# Altium PCB PCB2.PcbDoc (part 4 of 7)
Units mm, origin at the board's own origin, x right, y up, seen from the top; angles counter-clockwise.
Board outline 49 x 45 mm, 6 copper layers (Component Side, GND1, 3.3V, 1.2V, GND2, Solder Side), stack 1.629 mm thick; 56 components, 116 nets, 925 pads, 478 vias.
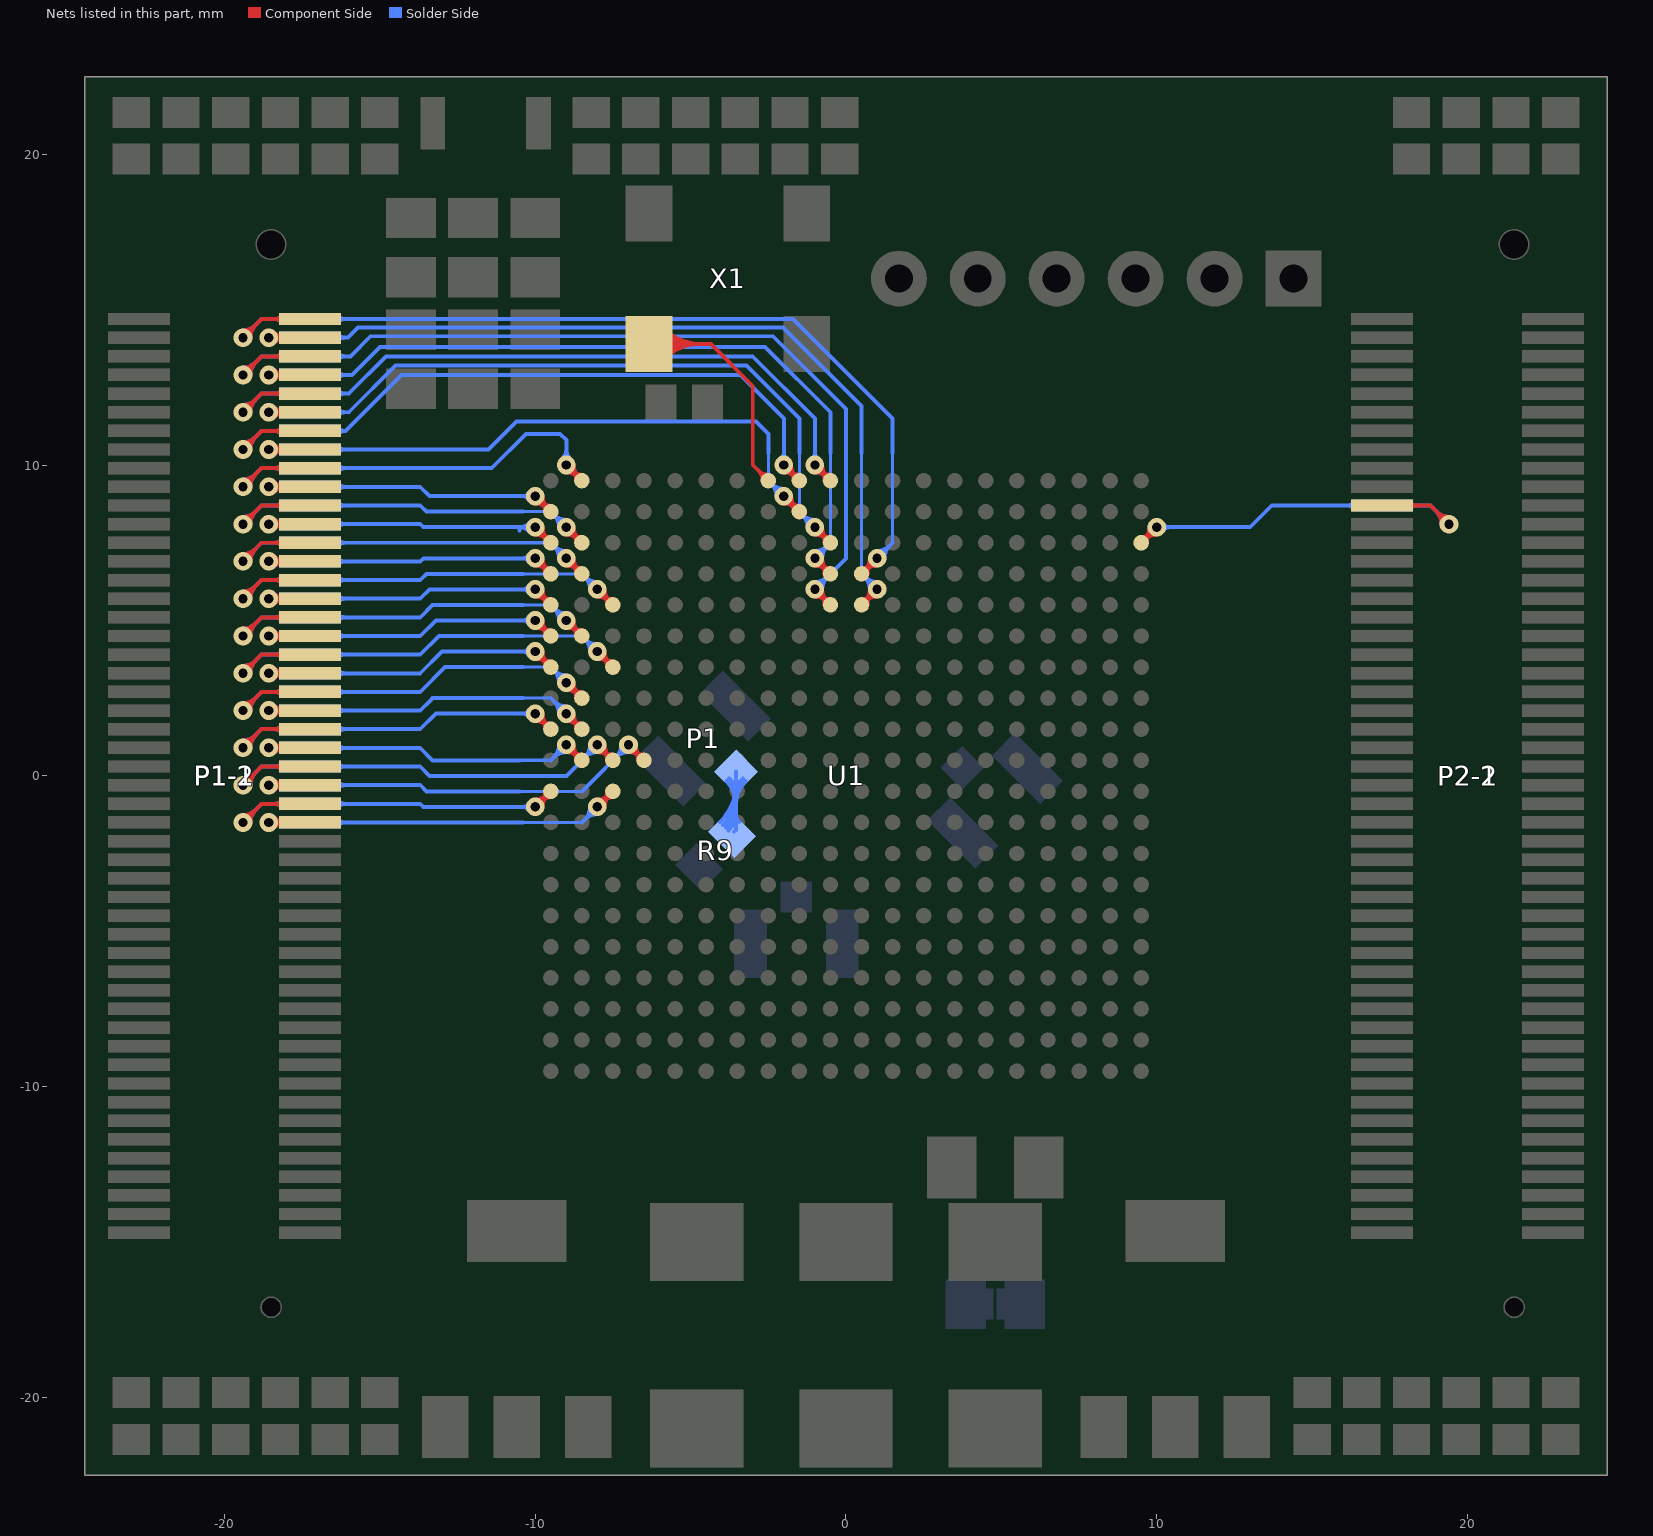
[diagram p8: the nets of this part, all layers, seen from the top]

## Via types
v1: diameter 0.6, hole 0.3, Component Side to Solder Side, tented both sides, 462 vias
v2: diameter 1.5, hole 0.8, Component Side to Solder Side, 10 vias
v3: diameter 1.2, hole 0.6, Component Side to Solder Side, 6 vias

## Nets (pads, with @x,y where several pads share a name; then routed paths per layer and width w, separated by ;. In a path a pad name is that pad's centre, name@x,y a point inside that pad or via, vN(x,y) a via of type N, cw(c..) or ccw(c..) an arc to the next point about the centre after c; other vN are vias at no path point) (continued)
NetP1_1: P1.1 R9.2 | length 16.2
  Solder Side w0.127: R9.2@-3.6,-1.8 -3.539,-1.739 P1.1@-3.539,0.139 ; -3.539,-0.914 ccw(c-4.593,-0.914) -3.848,-0.169 cw(c-4.593,-0.914) -3.539,-0.914 ; -3.539,-0.914 cw(c-2.486,-0.914) -3.231,-0.169 ccw(c-2.486,-0.914) -3.539,-0.914 ; -3.539,-0.608 ccw(c-4.287,-0.608) -3.758,-0.08 cw(c-4.287,-0.608) -3.539,-0.608 ; -3.539,-0.608 cw(c-2.792,-0.608) -3.32,-0.08 ccw(c-2.792,-0.608) -3.539,-0.608 ; R9.2@-4.049,-1.49 ccw(c-5.28,-0.26) -3.539,-0.26 cw(c-5.28,-0.26) R9.2@-4.049,-1.49 ; R9.2@-3.959,-1.58 ccw(c-4.973,-0.566) -3.539,-0.566 cw(c-4.973,-0.566) R9.2@-3.959,-1.58 ; R9.2@-3.869,-1.67 ccw(c-4.666,-0.873) -3.539,-0.873 cw(c-4.666,-0.873) R9.2@-3.869,-1.67 ; R9.2@-3.78,-1.76 ccw(c-4.36,-1.18) -3.539,-1.18 cw(c-4.36,-1.18) R9.2@-3.78,-1.76 ; -3.539,-1.231 ccw(c-3.172,-1.231) -3.432,-1.49 cw(c-3.172,-1.231) -3.539,-1.231
OSC: U1.A8 X1.3 | length 21.3
  Component Side w0.127: X1.3@-6.34,13.9 -4.35,13.9 -3,12.55 -3,11.2 -3,10.385 -3,10 U1.A8@-2.5,9.5 ; -5.296,13.9 ccw(c-5.296,12.856) -6.034,13.594 cw(c-5.296,12.856) -5.296,13.9 ; -5.296,13.9 cw(c-5.296,14.944) -6.034,14.206 ccw(c-5.296,14.944) -5.296,13.9 ; -4.989,13.9 ccw(c-4.989,12.549) -5.944,13.504 cw(c-4.989,12.549) -4.989,13.9 ; -4.989,13.9 cw(c-4.989,15.251) -5.944,14.296 ccw(c-4.989,15.251) -4.989,13.9 ; -4.683,13.9 ccw(c-4.683,12.243) -5.855,13.415 cw(c-4.683,12.243) -4.683,13.9 ; -4.683,13.9 cw(c-4.683,15.557) -5.855,14.385 ccw(c-4.683,15.557) -4.683,13.9 ; -2.818,9.818 ccw(c-2.5,10.137) -2.5,9.686 cw(c-2.5,10.137) -2.818,9.818 ; -2.818,9.818 cw(c-3.137,9.5) -2.687,9.5 ccw(c-3.137,9.5) -2.818,9.818
P1-02: P1-1.2 P1-2.2 U1.D11 | length 42
  Component Side w0.127: v1(-19.404,14.1) -18.804,14.7 P1-1.2@-17.25,14.7 ; U1.D11@0.5,6.5 v1(1,7) ; -19,14.504 ccw(c-18.597,14.1) -19.168,14.1 cw(c-18.597,14.1) -19,14.504 ; -19,14.504 cw(c-19.404,14.907) -19.404,14.336 ccw(c-19.404,14.907) -19,14.504 ; -18.38,14.7 ccw(c-18.38,15.03) -18.147,14.797 cw(c-18.38,15.03) -18.38,14.7 ; -18.38,14.7 cw(c-18.38,14.37) -18.147,14.603 ccw(c-18.38,14.37) -18.38,14.7 ; U1.D11@0.596,6.596 ccw(c0.193,7) 0.764,7 cw(c0.193,7) U1.D11@0.596,6.596 ; U1.D11@0.596,6.596 cw(c1,6.193) 1,6.764 ccw(c1,6.193) U1.D11@0.596,6.596 ; v1@0.818,6.818 ccw(c1.137,6.5) 0.686,6.5 cw(c1.137,6.5) v1@0.818,6.818 ; v1@0.818,6.818 cw(c0.5,7.137) 0.5,6.686 ccw(c0.5,7.137) v1@0.818,6.818
  Solder Side w0.1: 1.5,7.5 1.5,10.385
  Solder Side w0.127: v1(-19.404,14.1) -18.804,14.7 P1-2.2@-17.25,14.7 ; P1-2.2@-17.2,14.7 P1-2.2@-17.25,14.7 ; v1(1,7) 1.5,7.5 ; 1.5,10.385 1.5,11.1 1.5,11.5 -1.7,14.7 P1-2.2@-17.25,14.7 ; -19,14.504 ccw(c-18.597,14.1) -19.168,14.1 cw(c-18.597,14.1) -19,14.504 ; -19,14.504 cw(c-19.404,14.907) -19.404,14.336 ccw(c-19.404,14.907) -19,14.504 ; -18.38,14.7 ccw(c-18.38,15.03) -18.147,14.797 cw(c-18.38,15.03) -18.38,14.7 ; -18.38,14.7 cw(c-18.38,14.37) -18.147,14.603 ccw(c-18.38,14.37) -18.38,14.7 ; -16.12,14.7 ccw(c-16.12,14.37) -16.353,14.603 cw(c-16.12,14.37) -16.12,14.7 ; -16.12,14.7 cw(c-16.12,15.03) -16.353,14.797 ccw(c-16.12,15.03) -16.12,14.7 ; 1.404,7.404 ccw(c1.807,7) 1.237,7 cw(c1.807,7) 1.404,7.404 ; 1.404,7.404 cw(c1,7.807) 1,7.237 ccw(c1,7.807) 1.404,7.404
P1-04: P1-1.4 P1-2.4 U1.E11 | length 40.1
  Component Side w0.127: v1@-18.677,14.1 v1(-18.577,14.1) P1-1.4@-17.25,14.1 ; U1.E11@0.5,5.5 v1(1,6) ; v1@-18.38,14.1 ccw(c-18.38,14.43) -18.147,14.197 cw(c-18.38,14.43) v1@-18.38,14.1 ; v1@-18.38,14.1 cw(c-18.38,13.77) -18.147,14.003 ccw(c-18.38,13.77) v1@-18.38,14.1 ; P1-1.4@-18.006,14.1 ccw(c-18.006,13.529) -18.41,13.933 cw(c-18.006,13.529) P1-1.4@-18.006,14.1 ; P1-1.4@-18.006,14.1 cw(c-18.006,14.671) -18.41,14.267 ccw(c-18.006,14.671) P1-1.4@-18.006,14.1 ; U1.E11@0.596,5.596 ccw(c0.193,6) 0.764,6 cw(c0.193,6) U1.E11@0.596,5.596 ; U1.E11@0.596,5.596 cw(c1,5.193) 1,5.764 ccw(c1,5.193) U1.E11@0.596,5.596 ; v1@0.818,5.818 ccw(c1.137,5.5) 0.686,5.5 cw(c1.137,5.5) v1@0.818,5.818 ; v1@0.818,5.818 cw(c0.5,6.137) 0.5,5.686 ccw(c0.5,6.137) v1@0.818,5.818
  Solder Side w0.1: 0.5,6.5 0.5,10.385
  Solder Side w0.127: v1@-18.677,14.1 v1(-18.577,14.1) P1-2.4@-17.45,14.1 ; P1-2.4@-17.25,14.1 -16.023,14.1 -15.7,14.423 -2.023,14.423 0.5,11.9 0.5,10.385 ; 0.5,6.5 v1(1,6) ; v1@-18.38,14.1 ccw(c-18.38,14.43) -18.147,14.197 cw(c-18.38,14.43) v1@-18.38,14.1 ; v1@-18.38,14.1 cw(c-18.38,13.77) -18.147,14.003 ccw(c-18.38,13.77) v1@-18.38,14.1 ; P1-2.4@-18.006,14.1 ccw(c-18.006,13.529) -18.41,13.933 cw(c-18.006,13.529) P1-2.4@-18.006,14.1 ; P1-2.4@-18.006,14.1 cw(c-18.006,14.671) -18.41,14.267 ccw(c-18.006,14.671) P1-2.4@-18.006,14.1 ; -16.12,14.1 ccw(c-16.12,13.77) -16.353,14.003 cw(c-16.12,13.77) -16.12,14.1 ; -16.12,14.1 cw(c-16.12,14.43) -16.353,14.197 ccw(c-16.12,14.43) -16.12,14.1 ; 0.596,6.404 ccw(c1,6.807) 1,6.237 cw(c1,6.807) 0.596,6.404 ; 0.596,6.404 cw(c0.193,6) 0.764,6 ccw(c0.193,6) 0.596,6.404
P1-06: P1-1.6 P1-2.6 U1.E10 | length 41.9
  Component Side w0.127: v1(-19.404,12.9) -18.804,13.5 P1-1.6@-17.25,13.5 ; v1(-1,6) U1.E10@-0.5,5.5 ; -19,13.304 ccw(c-18.597,12.9) -19.168,12.9 cw(c-18.597,12.9) -19,13.304 ; -19,13.304 cw(c-19.404,13.707) -19.404,13.136 ccw(c-19.404,13.707) -19,13.304 ; -18.38,13.5 ccw(c-18.38,13.83) -18.147,13.597 cw(c-18.38,13.83) -18.38,13.5 ; -18.38,13.5 cw(c-18.38,13.17) -18.147,13.403 ccw(c-18.38,13.17) -18.38,13.5 ; v1@-0.818,5.818 ccw(c-0.5,6.137) -0.5,5.686 cw(c-0.5,6.137) v1@-0.818,5.818 ; v1@-0.818,5.818 cw(c-1.137,5.5) -0.687,5.5 ccw(c-1.137,5.5) v1@-0.818,5.818 ; U1.E10@-0.596,5.596 ccw(c-1,5.193) -1,5.764 cw(c-1,5.193) U1.E10@-0.596,5.596 ; U1.E10@-0.596,5.596 cw(c-0.193,6) -0.764,6 ccw(c-0.193,6) U1.E10@-0.596,5.596
  Solder Side w0.127: v1(-19.404,12.9) -18.804,13.5 P1-2.6@-17.25,13.5 -15.946,13.5 -15.3,14.146 -2.346,14.146 0,11.8 0,10.5 0,7 v1(-1,6) ; -19,13.304 ccw(c-18.597,12.9) -19.168,12.9 cw(c-18.597,12.9) -19,13.304 ; -19,13.304 cw(c-19.404,13.707) -19.404,13.136 ccw(c-19.404,13.707) -19,13.304 ; -18.38,13.5 ccw(c-18.38,13.83) -18.147,13.597 cw(c-18.38,13.83) -18.38,13.5 ; -18.38,13.5 cw(c-18.38,13.17) -18.147,13.403 ccw(c-18.38,13.17) -18.38,13.5 ; -16.12,13.5 ccw(c-16.12,13.17) -16.353,13.403 cw(c-16.12,13.17) -16.12,13.5 ; -16.12,13.5 cw(c-16.12,13.83) -16.353,13.597 ccw(c-16.12,13.83) -16.12,13.5 ; -0.596,6.404 ccw(c-0.193,6) -0.764,6 cw(c-0.193,6) -0.596,6.404 ; -0.596,6.404 cw(c-1,6.807) -1,6.237 ccw(c-1,6.807) -0.596,6.404
P1-08: P1-1.8 P1-2.8 U1.D10 | length 38.2
  Component Side w0.127: v1@-18.677,12.9 v1(-18.577,12.9) P1-1.8@-17.25,12.9 ; v1(-1,7) U1.D10@-0.5,6.5 ; v1@-18.38,12.9 ccw(c-18.38,13.23) -18.147,12.997 cw(c-18.38,13.23) v1@-18.38,12.9 ; v1@-18.38,12.9 cw(c-18.38,12.57) -18.147,12.803 ccw(c-18.38,12.57) v1@-18.38,12.9 ; P1-1.8@-18.006,12.9 ccw(c-18.006,12.329) -18.41,12.733 cw(c-18.006,12.329) P1-1.8@-18.006,12.9 ; P1-1.8@-18.006,12.9 cw(c-18.006,13.471) -18.41,13.067 ccw(c-18.006,13.471) P1-1.8@-18.006,12.9 ; v1@-0.818,6.818 ccw(c-0.5,7.137) -0.5,6.686 cw(c-0.5,7.137) v1@-0.818,6.818 ; v1@-0.818,6.818 cw(c-1.137,6.5) -0.687,6.5 ccw(c-1.137,6.5) v1@-0.818,6.818 ; U1.D10@-0.596,6.596 ccw(c-1,6.193) -1,6.764 cw(c-1,6.193) U1.D10@-0.596,6.596 ; U1.D10@-0.596,6.596 cw(c-0.193,7) -0.764,7 ccw(c-0.193,7) U1.D10@-0.596,6.596
  Solder Side w0.1: -0.5,7.5 -0.5,10.385
  Solder Side w0.127: v1@-18.677,12.9 v1(-18.577,12.9) P1-2.8@-17.25,12.9 -15.9,12.9 -15,13.8 -2.6,13.8 -0.5,11.7 -0.5,10.385 ; v1(-1,7) -0.5,7.5 ; v1@-18.38,12.9 ccw(c-18.38,13.23) -18.147,12.997 cw(c-18.38,13.23) v1@-18.38,12.9 ; v1@-18.38,12.9 cw(c-18.38,12.57) -18.147,12.803 ccw(c-18.38,12.57) v1@-18.38,12.9 ; P1-2.8@-18.006,12.9 ccw(c-18.006,12.329) -18.41,12.733 cw(c-18.006,12.329) P1-2.8@-18.006,12.9 ; P1-2.8@-18.006,12.9 cw(c-18.006,13.471) -18.41,13.067 ccw(c-18.006,13.471) P1-2.8@-18.006,12.9 ; -16.12,12.9 ccw(c-16.12,12.57) -16.353,12.803 cw(c-16.12,12.57) -16.12,12.9 ; -16.12,12.9 cw(c-16.12,13.23) -16.353,12.997 ccw(c-16.12,13.23) -16.12,12.9 ; -0.596,7.404 ccw(c-0.193,7) -0.764,7 cw(c-0.193,7) -0.596,7.404 ; -0.596,7.404 cw(c-1,7.807) -1,7.237 ccw(c-1,7.807) -0.596,7.404
P1-10: P1-1.10 P1-2.10 U1.A10 | length 35.3
  Component Side w0.127: v1(-19.404,11.7) -18.804,12.3 P1-1.10@-17.25,12.3 ; v1(-1,10) U1.A10@-0.5,9.5 ; -19,12.104 ccw(c-18.597,11.7) -19.168,11.7 cw(c-18.597,11.7) -19,12.104 ; -19,12.104 cw(c-19.404,12.507) -19.404,11.936 ccw(c-19.404,12.507) -19,12.104 ; -18.38,12.3 ccw(c-18.38,12.63) -18.147,12.397 cw(c-18.38,12.63) -18.38,12.3 ; -18.38,12.3 cw(c-18.38,11.97) -18.147,12.203 ccw(c-18.38,11.97) -18.38,12.3 ; v1@-0.818,9.818 ccw(c-0.5,10.137) -0.5,9.686 cw(c-0.5,10.137) v1@-0.818,9.818 ; v1@-0.818,9.818 cw(c-1.137,9.5) -0.687,9.5 ccw(c-1.137,9.5) v1@-0.818,9.818 ; U1.A10@-0.596,9.596 ccw(c-1,9.193) -1,9.764 cw(c-1,9.193) U1.A10@-0.596,9.596 ; U1.A10@-0.596,9.596 cw(c-0.193,10) -0.764,10 ccw(c-0.193,10) U1.A10@-0.596,9.596
  Solder Side w0.127: v1(-19.404,11.7) -18.804,12.3 P1-2.10@-17.25,12.3 -16,12.3 -14.8,13.5 -3,13.5 -1,11.5 -1,10.385 ; v1(-1,10) -1,10.385 ; -19,12.104 ccw(c-18.597,11.7) -19.168,11.7 cw(c-18.597,11.7) -19,12.104 ; -19,12.104 cw(c-19.404,12.507) -19.404,11.936 ccw(c-19.404,12.507) -19,12.104 ; -18.38,12.3 ccw(c-18.38,12.63) -18.147,12.397 cw(c-18.38,12.63) -18.38,12.3 ; -18.38,12.3 cw(c-18.38,11.97) -18.147,12.203 ccw(c-18.38,11.97) -18.38,12.3 ; -16.12,12.3 ccw(c-16.12,11.97) -16.353,12.203 cw(c-16.12,11.97) -16.12,12.3 ; -16.12,12.3 cw(c-16.12,12.63) -16.353,12.397 ccw(c-16.12,12.63) -16.12,12.3 ; -1,10.385 ccw(c-0.805,10.385) -0.893,10.211 cw(c-0.805,10.385) -1,10.385 ; -1,10.385 cw(c-1.195,10.385) -1.107,10.211 ccw(c-1.195,10.385) -1,10.385
P1-12: P1-1.12 P1-2.12 U1.C10 | length 36
  Component Side w0.127: v1@-18.677,11.7 v1(-18.577,11.7) P1-1.12@-17.25,11.7 ; v1(-1,8) U1.C10@-0.5,7.5 ; v1@-18.38,11.7 ccw(c-18.38,12.03) -18.147,11.797 cw(c-18.38,12.03) v1@-18.38,11.7 ; v1@-18.38,11.7 cw(c-18.38,11.37) -18.147,11.603 ccw(c-18.38,11.37) v1@-18.38,11.7 ; P1-1.12@-18.006,11.7 ccw(c-18.006,11.129) -18.41,11.533 cw(c-18.006,11.129) P1-1.12@-18.006,11.7 ; P1-1.12@-18.006,11.7 cw(c-18.006,12.271) -18.41,11.867 ccw(c-18.006,12.271) P1-1.12@-18.006,11.7 ; v1@-0.818,7.818 ccw(c-0.5,8.137) -0.5,7.686 cw(c-0.5,8.137) v1@-0.818,7.818 ; v1@-0.818,7.818 cw(c-1.137,7.5) -0.687,7.5 ccw(c-1.137,7.5) v1@-0.818,7.818 ; U1.C10@-0.596,7.596 ccw(c-1,7.193) -1,7.764 cw(c-1,7.193) U1.C10@-0.596,7.596 ; U1.C10@-0.596,7.596 cw(c-0.193,8) -0.764,8 ccw(c-0.193,8) U1.C10@-0.596,7.596
  Solder Side w0.1: -1.5,8.5 -1.5,10.385
  Solder Side w0.127: v1@-18.677,11.7 v1(-18.577,11.7) P1-2.12@-17.25,11.7 -16,11.7 -14.5,13.2 -3.2,13.2 -1.5,11.5 -1.5,10.385 ; -1.5,8.5 v1(-1,8) ; v1@-18.38,11.7 ccw(c-18.38,12.03) -18.147,11.797 cw(c-18.38,12.03) v1@-18.38,11.7 ; v1@-18.38,11.7 cw(c-18.38,11.37) -18.147,11.603 ccw(c-18.38,11.37) v1@-18.38,11.7 ; P1-2.12@-18.006,11.7 ccw(c-18.006,11.129) -18.41,11.533 cw(c-18.006,11.129) P1-2.12@-18.006,11.7 ; P1-2.12@-18.006,11.7 cw(c-18.006,12.271) -18.41,11.867 ccw(c-18.006,12.271) P1-2.12@-18.006,11.7 ; -16.12,11.7 ccw(c-16.12,11.37) -16.353,11.603 cw(c-16.12,11.37) -16.12,11.7 ; -16.12,11.7 cw(c-16.12,12.03) -16.353,11.797 ccw(c-16.12,12.03) -16.12,11.7 ; -1.404,8.404 ccw(c-1,8.807) -1,8.237 cw(c-1,8.807) -1.404,8.404 ; -1.404,8.404 cw(c-1.807,8) -1.237,8 ccw(c-1.807,8) -1.404,8.404
P1-14: P1-1.14 P1-2.14 U1.A9 | length 34.4
  Component Side w0.127: v1(-19.404,10.5) -18.804,11.1 P1-1.14@-17.25,11.1 ; v1(-2,10) U1.A9@-1.5,9.5 ; -19,10.904 ccw(c-18.597,10.5) -19.168,10.5 cw(c-18.597,10.5) -19,10.904 ; -19,10.904 cw(c-19.404,11.307) -19.404,10.736 ccw(c-19.404,11.307) -19,10.904 ; -18.38,11.1 ccw(c-18.38,11.43) -18.147,11.197 cw(c-18.38,11.43) -18.38,11.1 ; -18.38,11.1 cw(c-18.38,10.77) -18.147,11.003 ccw(c-18.38,10.77) -18.38,11.1 ; v1@-1.818,9.818 ccw(c-1.5,10.137) -1.5,9.686 cw(c-1.5,10.137) v1@-1.818,9.818 ; v1@-1.818,9.818 cw(c-2.137,9.5) -1.687,9.5 ccw(c-2.137,9.5) v1@-1.818,9.818 ; U1.A9@-1.596,9.596 ccw(c-2,9.193) -2,9.764 cw(c-2,9.193) U1.A9@-1.596,9.596 ; U1.A9@-1.596,9.596 cw(c-1.193,10) -1.764,10 ccw(c-1.193,10) U1.A9@-1.596,9.596
  Solder Side w0.127: v1(-19.404,10.5) -18.804,11.1 P1-2.14@-17.25,11.1 ; P1-2.14@-17.2,11.1 P1-2.14@-17.25,11.1 ; v1(-2,10) -2,10.385 ; -19,10.904 ccw(c-18.597,10.5) -19.168,10.5 cw(c-18.597,10.5) -19,10.904 ; -19,10.904 cw(c-19.404,11.307) -19.404,10.736 ccw(c-19.404,11.307) -19,10.904 ; -18.38,11.1 ccw(c-18.38,11.43) -18.147,11.197 cw(c-18.38,11.43) -18.38,11.1 ; -18.38,11.1 cw(c-18.38,10.77) -18.147,11.003 ccw(c-18.38,10.77) -18.38,11.1 ; P1-2.14@-17.25,11.1 -16.1,11.1 -14.3,12.9 -3.4,12.9 -2,11.5 -2,11 -2,10.385 ; -16.12,11.1 ccw(c-16.12,10.77) -16.353,11.003 cw(c-16.12,10.77) -16.12,11.1 ; -16.12,11.1 cw(c-16.12,11.43) -16.353,11.197 ccw(c-16.12,11.43) -16.12,11.1 ; -2,10.385 ccw(c-1.805,10.385) -1.893,10.211 cw(c-1.805,10.385) -2,10.385 ; -2,10.385 cw(c-2.195,10.385) -2.107,10.211 ccw(c-2.195,10.385) -2,10.385
P1-16: P1-1.16 P1-2.16 U1.B9 | length 32.8
  Component Side w0.127: v1@-18.677,10.5 v1(-18.577,10.5) P1-1.16@-17.25,10.5 ; v1(-2,9) U1.B9@-1.5,8.5 ; v1@-18.38,10.5 ccw(c-18.38,10.83) -18.147,10.597 cw(c-18.38,10.83) v1@-18.38,10.5 ; v1@-18.38,10.5 cw(c-18.38,10.17) -18.147,10.403 ccw(c-18.38,10.17) v1@-18.38,10.5 ; P1-1.16@-18.006,10.5 ccw(c-18.006,9.929) -18.41,10.333 cw(c-18.006,9.929) P1-1.16@-18.006,10.5 ; P1-1.16@-18.006,10.5 cw(c-18.006,11.071) -18.41,10.667 ccw(c-18.006,11.071) P1-1.16@-18.006,10.5 ; v1@-1.818,8.818 ccw(c-1.5,9.137) -1.5,8.686 cw(c-1.5,9.137) v1@-1.818,8.818 ; v1@-1.818,8.818 cw(c-2.137,8.5) -1.687,8.5 ccw(c-2.137,8.5) v1@-1.818,8.818 ; U1.B9@-1.596,8.596 ccw(c-2,8.193) -2,8.764 cw(c-2,8.193) U1.B9@-1.596,8.596 ; U1.B9@-1.596,8.596 cw(c-1.193,9) -1.764,9 ccw(c-1.193,9) U1.B9@-1.596,8.596
  Solder Side w0.1: -2.5,9.5 -2.5,10.385
  Solder Side w0.127: v1@-18.677,10.5 v1(-18.577,10.5) P1-2.16@-17.25,10.5 -11.5,10.5 -10.6,11.4 -2.9,11.4 -2.5,11 -2.5,10.385 ; -2.5,9.5 v1(-2,9) ; v1@-18.38,10.5 ccw(c-18.38,10.83) -18.147,10.597 cw(c-18.38,10.83) v1@-18.38,10.5 ; v1@-18.38,10.5 cw(c-18.38,10.17) -18.147,10.403 ccw(c-18.38,10.17) v1@-18.38,10.5 ; P1-2.16@-18.006,10.5 ccw(c-18.006,9.929) -18.41,10.333 cw(c-18.006,9.929) P1-2.16@-18.006,10.5 ; P1-2.16@-18.006,10.5 cw(c-18.006,11.071) -18.41,10.667 ccw(c-18.006,11.071) P1-2.16@-18.006,10.5 ; -16.12,10.5 ccw(c-16.12,10.17) -16.353,10.403 cw(c-16.12,10.17) -16.12,10.5 ; -16.12,10.5 cw(c-16.12,10.83) -16.353,10.597 ccw(c-16.12,10.83) -16.12,10.5 ; -2.404,9.404 ccw(c-2,9.807) -2,9.237 cw(c-2,9.807) -2.404,9.404 ; -2.404,9.404 cw(c-2.807,9) -2.237,9 ccw(c-2.807,9) -2.404,9.404
P1-18: P1-1.18 P1-2.18 U1.A2 | length 26.5
  Component Side w0.127: v1(-19.404,9.3) -18.804,9.9 P1-1.18@-17.25,9.9 ; v1(-9,10) U1.A2@-8.5,9.5 ; -19,9.704 ccw(c-18.597,9.3) -19.168,9.3 cw(c-18.597,9.3) -19,9.704 ; -19,9.704 cw(c-19.404,10.107) -19.404,9.536 ccw(c-19.404,10.107) -19,9.704 ; -18.38,9.9 ccw(c-18.38,10.23) -18.147,9.997 cw(c-18.38,10.23) -18.38,9.9 ; -18.38,9.9 cw(c-18.38,9.57) -18.147,9.803 ccw(c-18.38,9.57) -18.38,9.9 ; v1@-8.818,9.818 ccw(c-8.5,10.137) -8.5,9.686 cw(c-8.5,10.137) v1@-8.818,9.818 ; v1@-8.818,9.818 cw(c-9.137,9.5) -8.686,9.5 ccw(c-9.137,9.5) v1@-8.818,9.818 ; U1.A2@-8.596,9.596 ccw(c-9,9.193) -9,9.764 cw(c-9,9.193) U1.A2@-8.596,9.596 ; U1.A2@-8.596,9.596 cw(c-8.193,10) -8.764,10 ccw(c-8.193,10) U1.A2@-8.596,9.596
  Solder Side w0.127: v1(-19.404,9.3) -18.804,9.9 P1-2.18@-17.25,9.9 ; P1-2.18@-17.2,9.9 P1-2.18@-17.25,9.9 ; v1(-9,10) -9,10.5 ; -19,9.704 ccw(c-18.597,9.3) -19.168,9.3 cw(c-18.597,9.3) -19,9.704 ; -19,9.704 cw(c-19.404,10.107) -19.404,9.536 ccw(c-19.404,10.107) -19,9.704 ; -18.38,9.9 ccw(c-18.38,10.23) -18.147,9.997 cw(c-18.38,10.23) -18.38,9.9 ; -18.38,9.9 cw(c-18.38,9.57) -18.147,9.803 ccw(c-18.38,9.57) -18.38,9.9 ; P1-2.18@-17.25,9.9 -11.5,9.9 -11.4,9.9 -10.3,11 -9.2,11 -9,10.8 -9,10.5 ; -16.12,9.9 ccw(c-16.12,9.57) -16.353,9.803 cw(c-16.12,9.57) -16.12,9.9 ; -16.121,9.9 cw(c-16.121,10.229) -16.353,9.997 ccw(c-16.121,10.229) -16.121,9.9 ; -9,10.5 ccw(c-8.59,10.5) -8.85,10.183 cw(c-8.59,10.5) -9,10.5 ; -9,10.5 cw(c-9.41,10.5) -9.15,10.183 ccw(c-9.41,10.5) -9,10.5
P1-20: P1-1.20 P1-2.20 U1.B1 | length 21.7
  Component Side w0.127: v1@-18.677,9.3 v1(-18.577,9.3) P1-1.20@-17.25,9.3 ; v1(-10,9) U1.B1@-9.5,8.5 ; v1@-18.38,9.3 ccw(c-18.38,9.63) -18.147,9.397 cw(c-18.38,9.63) v1@-18.38,9.3 ; v1@-18.38,9.3 cw(c-18.38,8.97) -18.147,9.203 ccw(c-18.38,8.97) v1@-18.38,9.3 ; P1-1.20@-18.006,9.3 ccw(c-18.006,8.729) -18.41,9.133 cw(c-18.006,8.729) P1-1.20@-18.006,9.3 ; P1-1.20@-18.006,9.3 cw(c-18.006,9.871) -18.41,9.467 ccw(c-18.006,9.871) P1-1.20@-18.006,9.3 ; v1@-9.818,8.818 ccw(c-9.5,9.137) -9.5,8.686 cw(c-9.5,9.137) v1@-9.818,8.818 ; v1@-9.818,8.818 cw(c-10.137,8.5) -9.686,8.5 ccw(c-10.137,8.5) v1@-9.818,8.818 ; U1.B1@-9.596,8.596 ccw(c-10,8.193) -10,8.764 cw(c-10,8.193) U1.B1@-9.596,8.596 ; U1.B1@-9.596,8.596 cw(c-9.193,9) -9.764,9 ccw(c-9.193,9) U1.B1@-9.596,8.596
  Solder Side w0.127: v1@-18.677,9.3 v1(-18.577,9.3) P1-2.20@-17.25,9.3 -13.7,9.3 -13.4,9 -11.5,9 -10.385,9 ; v1(-10,9) -10.385,9 ; v1@-18.38,9.3 ccw(c-18.38,9.63) -18.147,9.397 cw(c-18.38,9.63) v1@-18.38,9.3 ; v1@-18.38,9.3 cw(c-18.38,8.97) -18.147,9.203 ccw(c-18.38,8.97) v1@-18.38,9.3 ; P1-2.20@-18.006,9.3 ccw(c-18.006,8.729) -18.41,9.133 cw(c-18.006,8.729) P1-2.20@-18.006,9.3 ; P1-2.20@-18.006,9.3 cw(c-18.006,9.871) -18.41,9.467 ccw(c-18.006,9.871) P1-2.20@-18.006,9.3 ; -16.12,9.3 ccw(c-16.12,8.97) -16.353,9.203 cw(c-16.12,8.97) -16.12,9.3 ; -16.121,9.3 cw(c-16.121,9.629) -16.353,9.397 ccw(c-16.121,9.629) -16.121,9.3 ; -10.385,9 ccw(c-10.385,9.195) -10.211,9.107 cw(c-10.385,9.195) -10.385,9 ; -10.385,9 cw(c-10.385,8.805) -10.211,8.893 ccw(c-10.385,8.805) -10.385,9
P1-21: P2-1.21 P2-2.21 U1.C20 | length 23.8
  Component Side w0.127: U1.C20@9.5,7.5 v1(10,8) ; P2-1.21@17.25,8.7 18.804,8.7 v1(19.404,8.1) ; U1.C20@9.596,7.596 ccw(c9.193,8) 9.764,8 cw(c9.193,8) U1.C20@9.596,7.596 ; U1.C20@9.596,7.596 cw(c10,7.193) 10,7.764 ccw(c10,7.193) U1.C20@9.596,7.596 ; v1@9.818,7.818 ccw(c10.137,7.5) 9.687,7.5 cw(c10.137,7.5) v1@9.818,7.818 ; v1@9.818,7.818 cw(c9.5,8.137) 9.5,7.686 ccw(c9.5,8.137) v1@9.818,7.818 ; 18.38,8.7 ccw(c18.38,8.37) 18.147,8.603 cw(c18.38,8.37) 18.38,8.7 ; 18.38,8.7 cw(c18.38,9.03) 18.147,8.797 ccw(c18.38,9.03) 18.38,8.7 ; 19,8.504 ccw(c19.404,8.907) 19.404,8.336 cw(c19.404,8.907) 19,8.504 ; 19,8.504 cw(c18.597,8.1) 19.168,8.1 ccw(c18.597,8.1) 19,8.504
  Solder Side w0.127: v1(10,8) 10.385,8 ; v1(19.404,8.1) 18.804,8.7 P2-2.21@17.25,8.7 13.7,8.7 13,8 11.5,8 10.385,8 ; 10.385,8 ccw(c10.385,7.805) 10.211,7.893 cw(c10.385,7.805) 10.385,8 ; 10.385,8 cw(c10.385,8.195) 10.211,8.107 ccw(c10.385,8.195) 10.385,8 ; 16.12,8.7 ccw(c16.12,9.03) 16.353,8.797 cw(c16.12,9.03) 16.12,8.7 ; 16.12,8.7 cw(c16.12,8.37) 16.353,8.603 ccw(c16.12,8.37) 16.12,8.7 ; 18.38,8.7 ccw(c18.38,8.37) 18.147,8.603 cw(c18.38,8.37) 18.38,8.7 ; 18.38,8.7 cw(c18.38,9.03) 18.147,8.797 ccw(c18.38,9.03) 18.38,8.7 ; 19,8.504 ccw(c19.404,8.907) 19.404,8.336 cw(c19.404,8.907) 19,8.504 ; 19,8.504 cw(c18.597,8.1) 19.168,8.1 ccw(c18.597,8.1) 19,8.504
P1-22: P1-1.22 P1-2.22 U1.C2 | length 25.7
  Component Side w0.127: v1(-19.404,8.1) -18.804,8.7 P1-1.22@-17.25,8.7 ; v1(-9,8) U1.C2@-8.5,7.5 ; -19,8.504 ccw(c-18.597,8.1) -19.168,8.1 cw(c-18.597,8.1) -19,8.504 ; -19,8.504 cw(c-19.404,8.907) -19.404,8.336 ccw(c-19.404,8.907) -19,8.504 ; -18.38,8.7 ccw(c-18.38,9.03) -18.147,8.797 cw(c-18.38,9.03) -18.38,8.7 ; -18.38,8.7 cw(c-18.38,8.37) -18.147,8.603 ccw(c-18.38,8.37) -18.38,8.7 ; v1@-8.818,7.818 ccw(c-8.5,8.137) -8.5,7.686 cw(c-8.5,8.137) v1@-8.818,7.818 ; v1@-8.818,7.818 cw(c-9.137,7.5) -8.686,7.5 ccw(c-9.137,7.5) v1@-8.818,7.818 ; U1.C2@-8.596,7.596 ccw(c-9,7.193) -9,7.764 cw(c-9,7.193) U1.C2@-8.596,7.596 ; U1.C2@-8.596,7.596 cw(c-8.193,8) -8.764,8 ccw(c-8.193,8) U1.C2@-8.596,7.596
  Solder Side w0.1: -10.385,8.5 -9.5,8.5
  Solder Side w0.127: v1(-19.404,8.1) -18.804,8.7 P1-2.22@-17.25,8.7 -13.7,8.7 -13.5,8.5 -11.5,8.5 -10.385,8.5 ; -9.5,8.5 v1(-9,8) ; -19,8.504 ccw(c-18.597,8.1) -19.168,8.1 cw(c-18.597,8.1) -19,8.504 ; -19,8.504 cw(c-19.404,8.907) -19.404,8.336 ccw(c-19.404,8.907) -19,8.504 ; -18.38,8.7 ccw(c-18.38,9.03) -18.147,8.797 cw(c-18.38,9.03) -18.38,8.7 ; -18.38,8.7 cw(c-18.38,8.37) -18.147,8.603 ccw(c-18.38,8.37) -18.38,8.7 ; -16.12,8.7 ccw(c-16.12,8.37) -16.353,8.603 cw(c-16.12,8.37) -16.12,8.7 ; -16.121,8.7 cw(c-16.121,9.029) -16.353,8.797 ccw(c-16.121,9.029) -16.121,8.7 ; -9.404,8.404 ccw(c-9,8.807) -9,8.237 cw(c-9,8.807) -9.404,8.404 ; -9.404,8.404 cw(c-9.807,8) -9.237,8 ccw(c-9.807,8) -9.404,8.404
P1-24: P1-1.24 P1-2.24 U1.C1 | length 22.3
  Component Side w0.127: v1@-18.677,8.1 v1(-18.577,8.1) P1-1.24@-17.25,8.1 ; v1(-10,8) U1.C1@-9.5,7.5 ; v1@-18.38,8.1 ccw(c-18.38,8.43) -18.147,8.197 cw(c-18.38,8.43) v1@-18.38,8.1 ; v1@-18.38,8.1 cw(c-18.38,7.77) -18.147,8.003 ccw(c-18.38,7.77) v1@-18.38,8.1 ; P1-1.24@-18.006,8.1 ccw(c-18.006,7.529) -18.41,7.933 cw(c-18.006,7.529) P1-1.24@-18.006,8.1 ; P1-1.24@-18.006,8.1 cw(c-18.006,8.671) -18.41,8.267 ccw(c-18.006,8.671) P1-1.24@-18.006,8.1 ; v1@-9.818,7.818 ccw(c-9.5,8.137) -9.5,7.686 cw(c-9.5,8.137) v1@-9.818,7.818 ; v1@-9.818,7.818 cw(c-10.137,7.5) -9.686,7.5 ccw(c-10.137,7.5) v1@-9.818,7.818 ; U1.C1@-9.596,7.596 ccw(c-10,7.193) -10,7.764 cw(c-10,7.193) U1.C1@-9.596,7.596 ; U1.C1@-9.596,7.596 cw(c-9.193,8) -9.764,8 ccw(c-9.193,8) U1.C1@-9.596,7.596
  Solder Side w0.127: v1@-18.677,8.1 v1(-18.577,8.1) P1-2.24@-17.25,8.1 ; P1-2.24@-17.25,8.1 -13.7,8.1 ; -13.7,8.1 -13.6,8 -11.5,8 -10.5,8 ; -10.5,7.9 -10.5,8 ; v1(-10,8) -10.5,8 ; v1@-18.38,8.1 ccw(c-18.38,8.43) -18.147,8.197 cw(c-18.38,8.43) v1@-18.38,8.1 ; v1@-18.38,8.1 cw(c-18.38,7.77) -18.147,8.003 ccw(c-18.38,7.77) v1@-18.38,8.1 ; P1-2.24@-18.006,8.1 ccw(c-18.006,7.529) -18.41,7.933 cw(c-18.006,7.529) P1-2.24@-18.006,8.1 ; P1-2.24@-18.006,8.1 cw(c-18.006,8.671) -18.41,8.267 ccw(c-18.006,8.671) P1-2.24@-18.006,8.1 ; -16.12,8.1 ccw(c-16.12,7.77) -16.353,8.003 cw(c-16.12,7.77) -16.12,8.1 ; -16.121,8.1 cw(c-16.121,8.429) -16.353,8.197 ccw(c-16.121,8.429) -16.121,8.1 ; -10.5,8 ccw(c-10.5,8.41) -10.183,8.15 cw(c-10.5,8.41) -10.5,8 ; -10.5,8 cw(c-10.5,7.59) -10.183,7.85 ccw(c-10.5,7.59) -10.5,8
P1-26: P1-1.26 P1-2.26 U1.D2 | length 25.7
  Component Side w0.127: v1(-19.404,6.9) -18.804,7.5 P1-1.26@-17.25,7.5 ; v1(-9,7) U1.D2@-8.5,6.5 ; -19,7.304 ccw(c-18.597,6.9) -19.168,6.9 cw(c-18.597,6.9) -19,7.304 ; -19,7.304 cw(c-19.404,7.707) -19.404,7.136 ccw(c-19.404,7.707) -19,7.304 ; -18.38,7.5 ccw(c-18.38,7.83) -18.147,7.597 cw(c-18.38,7.83) -18.38,7.5 ; -18.38,7.5 cw(c-18.38,7.17) -18.147,7.403 ccw(c-18.38,7.17) -18.38,7.5 ; v1@-8.818,6.818 ccw(c-8.5,7.137) -8.5,6.686 cw(c-8.5,7.137) v1@-8.818,6.818 ; v1@-8.818,6.818 cw(c-9.137,6.5) -8.686,6.5 ccw(c-9.137,6.5) v1@-8.818,6.818 ; U1.D2@-8.596,6.596 ccw(c-9,6.193) -9,6.764 cw(c-9,6.193) U1.D2@-8.596,6.596 ; U1.D2@-8.596,6.596 cw(c-8.193,7) -8.764,7 ccw(c-8.193,7) U1.D2@-8.596,6.596
  Solder Side w0.1: -10.385,7.5 -9.5,7.5
  Solder Side w0.127: v1(-19.404,6.9) -18.804,7.5 P1-2.26@-17.25,7.5 ; P1-2.26@-17.2,7.5 P1-2.26@-17.25,7.5 ; -10.385,7.5 -11.5,7.5 P1-2.26@-17.25,7.5 ; -9.5,7.5 v1(-9,7) ; -19,7.304 ccw(c-18.597,6.9) -19.168,6.9 cw(c-18.597,6.9) -19,7.304 ; -19,7.304 cw(c-19.404,7.707) -19.404,7.136 ccw(c-19.404,7.707) -19,7.304 ; -18.38,7.5 ccw(c-18.38,7.83) -18.147,7.597 cw(c-18.38,7.83) -18.38,7.5 ; -18.38,7.5 cw(c-18.38,7.17) -18.147,7.403 ccw(c-18.38,7.17) -18.38,7.5 ; -16.12,7.5 ccw(c-16.12,7.17) -16.353,7.403 cw(c-16.12,7.17) -16.12,7.5 ; -16.121,7.5 cw(c-16.121,7.829) -16.353,7.597 ccw(c-16.121,7.829) -16.121,7.5 ; -9.404,7.404 ccw(c-9,7.807) -9,7.237 cw(c-9,7.807) -9.404,7.404 ; -9.404,7.404 cw(c-9.807,7) -9.237,7 ccw(c-9.807,7) -9.404,7.404
P1-28: P1-1.28 P1-2.28 U1.D1 | length 21.6
  Component Side w0.127: v1@-18.677,6.9 v1(-18.577,6.9) P1-1.28@-17.25,6.9 ; v1(-10,7) U1.D1@-9.5,6.5 ; v1@-18.38,6.9 ccw(c-18.38,7.23) -18.147,6.997 cw(c-18.38,7.23) v1@-18.38,6.9 ; v1@-18.38,6.9 cw(c-18.38,6.57) -18.147,6.803 ccw(c-18.38,6.57) v1@-18.38,6.9 ; P1-1.28@-18.006,6.9 ccw(c-18.006,6.329) -18.41,6.733 cw(c-18.006,6.329) P1-1.28@-18.006,6.9 ; P1-1.28@-18.006,6.9 cw(c-18.006,7.471) -18.41,7.067 ccw(c-18.006,7.471) P1-1.28@-18.006,6.9 ; v1@-9.818,6.818 ccw(c-9.5,7.137) -9.5,6.686 cw(c-9.5,7.137) v1@-9.818,6.818 ; v1@-9.818,6.818 cw(c-10.137,6.5) -9.686,6.5 ccw(c-10.137,6.5) v1@-9.818,6.818 ; U1.D1@-9.596,6.596 ccw(c-10,6.193) -10,6.764 cw(c-10,6.193) U1.D1@-9.596,6.596 ; U1.D1@-9.596,6.596 cw(c-9.193,7) -9.764,7 ccw(c-9.193,7) U1.D1@-9.596,6.596
  Solder Side w0.127: v1@-18.677,6.9 v1(-18.577,6.9) P1-2.28@-17.25,6.9 -13.7,6.9 -13.6,7 -11.5,7 -10.385,7 ; v1(-10,7) -10.385,7 ; v1@-18.38,6.9 ccw(c-18.38,7.23) -18.147,6.997 cw(c-18.38,7.23) v1@-18.38,6.9 ; v1@-18.38,6.9 cw(c-18.38,6.57) -18.147,6.803 ccw(c-18.38,6.57) v1@-18.38,6.9 ; P1-2.28@-18.006,6.9 ccw(c-18.006,6.329) -18.41,6.733 cw(c-18.006,6.329) P1-2.28@-18.006,6.9 ; P1-2.28@-18.006,6.9 cw(c-18.006,7.471) -18.41,7.067 ccw(c-18.006,7.471) P1-2.28@-18.006,6.9 ; -16.12,6.9 ccw(c-16.12,6.57) -16.353,6.803 cw(c-16.12,6.57) -16.12,6.9 ; -16.121,6.9 cw(c-16.121,7.229) -16.353,6.997 ccw(c-16.121,7.229) -16.121,6.9 ; -10.385,7 ccw(c-10.385,7.195) -10.211,7.107 cw(c-10.385,7.195) -10.385,7 ; -10.385,7 cw(c-10.385,6.805) -10.211,6.893 ccw(c-10.385,6.805) -10.385,7
P1-30: P1-1.30 P1-2.30 U1.E3 | length 26.8
  Component Side w0.127: v1(-19.404,5.7) -18.804,6.3 P1-1.30@-17.25,6.3 ; v1(-8,6) U1.E3@-7.5,5.5 ; -19,6.104 ccw(c-18.597,5.7) -19.168,5.7 cw(c-18.597,5.7) -19,6.104 ; -19,6.104 cw(c-19.404,6.507) -19.404,5.936 ccw(c-19.404,6.507) -19,6.104 ; -18.38,6.3 ccw(c-18.38,6.63) -18.147,6.397 cw(c-18.38,6.63) -18.38,6.3 ; -18.38,6.3 cw(c-18.38,5.97) -18.147,6.203 ccw(c-18.38,5.97) -18.38,6.3 ; v1@-7.818,5.818 ccw(c-7.5,6.137) -7.5,5.686 cw(c-7.5,6.137) v1@-7.818,5.818 ; v1@-7.818,5.818 cw(c-8.137,5.5) -7.686,5.5 ccw(c-8.137,5.5) v1@-7.818,5.818 ; U1.E3@-7.596,5.596 ccw(c-8,5.193) -8,5.764 cw(c-8,5.193) U1.E3@-7.596,5.596 ; U1.E3@-7.596,5.596 cw(c-7.193,6) -7.764,6 ccw(c-7.193,6) U1.E3@-7.596,5.596
  Solder Side w0.1: -10.385,6.5 -8.5,6.5
  Solder Side w0.127: v1(-19.404,5.7) -18.804,6.3 P1-2.30@-17.25,6.3 ; P1-2.30@-17.2,6.3 P1-2.30@-17.25,6.3 ; -10.385,6.5 -11.5,6.5 -13.5,6.5 -13.7,6.3 P1-2.30@-17.25,6.3 ; -8.5,6.5 v1(-8,6) ; -19,6.104 ccw(c-18.597,5.7) -19.168,5.7 cw(c-18.597,5.7) -19,6.104 ; -19,6.104 cw(c-19.404,6.507) -19.404,5.936 ccw(c-19.404,6.507) -19,6.104 ; -18.38,6.3 ccw(c-18.38,6.63) -18.147,6.397 cw(c-18.38,6.63) -18.38,6.3 ; -18.38,6.3 cw(c-18.38,5.97) -18.147,6.203 ccw(c-18.38,5.97) -18.38,6.3 ; -16.12,6.3 ccw(c-16.12,5.97) -16.353,6.203 cw(c-16.12,5.97) -16.12,6.3 ; -16.121,6.3 cw(c-16.121,6.629) -16.353,6.397 ccw(c-16.121,6.629) -16.121,6.3 ; -8.404,6.404 ccw(c-8,6.807) -8,6.237 cw(c-8,6.807) -8.404,6.404 ; -8.404,6.404 cw(c-8.807,6) -8.237,6 ccw(c-8.807,6) -8.404,6.404
P1-32: P1-1.32 P1-2.32 U1.E1 | length 21.7
  Component Side w0.127: v1@-18.677,5.7 v1(-18.577,5.7) P1-1.32@-17.25,5.7 ; v1(-10,6) U1.E1@-9.5,5.5 ; v1@-18.38,5.7 ccw(c-18.38,6.03) -18.147,5.797 cw(c-18.38,6.03) v1@-18.38,5.7 ; v1@-18.38,5.7 cw(c-18.38,5.37) -18.147,5.603 ccw(c-18.38,5.37) v1@-18.38,5.7 ; P1-1.32@-18.006,5.7 ccw(c-18.006,5.129) -18.41,5.533 cw(c-18.006,5.129) P1-1.32@-18.006,5.7 ; P1-1.32@-18.006,5.7 cw(c-18.006,6.271) -18.41,5.867 ccw(c-18.006,6.271) P1-1.32@-18.006,5.7 ; v1@-9.818,5.818 ccw(c-9.5,6.137) -9.5,5.686 cw(c-9.5,6.137) v1@-9.818,5.818 ; v1@-9.818,5.818 cw(c-10.137,5.5) -9.686,5.5 ccw(c-10.137,5.5) v1@-9.818,5.818 ; U1.E1@-9.596,5.596 ccw(c-10,5.193) -10,5.764 cw(c-10,5.193) U1.E1@-9.596,5.596 ; U1.E1@-9.596,5.596 cw(c-9.193,6) -9.764,6 ccw(c-9.193,6) U1.E1@-9.596,5.596
  Solder Side w0.127: v1@-18.677,5.7 v1(-18.577,5.7) P1-2.32@-17.25,5.7 -13.7,5.7 -13.4,6 -11.5,6 -10.385,6 ; v1(-10,6) -10.385,6 ; v1@-18.38,5.7 ccw(c-18.38,6.03) -18.147,5.797 cw(c-18.38,6.03) v1@-18.38,5.7 ; v1@-18.38,5.7 cw(c-18.38,5.37) -18.147,5.603 ccw(c-18.38,5.37) v1@-18.38,5.7 ; P1-2.32@-18.006,5.7 ccw(c-18.006,5.129) -18.41,5.533 cw(c-18.006,5.129) P1-2.32@-18.006,5.7 ; P1-2.32@-18.006,5.7 cw(c-18.006,6.271) -18.41,5.867 ccw(c-18.006,6.271) P1-2.32@-18.006,5.7 ; -16.12,5.7 ccw(c-16.12,5.37) -16.353,5.603 cw(c-16.12,5.37) -16.12,5.7 ; -16.121,5.7 cw(c-16.121,6.029) -16.353,5.797 ccw(c-16.121,6.029) -16.121,5.7 ; -10.385,6 ccw(c-10.385,6.195) -10.211,6.107 cw(c-10.385,6.195) -10.385,6 ; -10.385,6 cw(c-10.385,5.805) -10.211,5.893 ccw(c-10.385,5.805) -10.385,6
P1-34: P1-1.34 P1-2.34 U1.F2 | length 25.8
  Component Side w0.127: v1(-19.404,4.5) -18.804,5.1 P1-1.34@-17.25,5.1 ; v1(-9,5) U1.F2@-8.5,4.5 ; -19,4.904 ccw(c-18.597,4.5) -19.168,4.5 cw(c-18.597,4.5) -19,4.904 ; -19,4.904 cw(c-19.404,5.307) -19.404,4.736 ccw(c-19.404,5.307) -19,4.904 ; -18.38,5.1 ccw(c-18.38,5.43) -18.147,5.197 cw(c-18.38,5.43) -18.38,5.1 ; -18.38,5.1 cw(c-18.38,4.77) -18.147,5.003 ccw(c-18.38,4.77) -18.38,5.1 ; v1@-8.818,4.818 ccw(c-8.5,5.137) -8.5,4.686 cw(c-8.5,5.137) v1@-8.818,4.818 ; v1@-8.818,4.818 cw(c-9.137,4.5) -8.686,4.5 ccw(c-9.137,4.5) v1@-8.818,4.818 ; U1.F2@-8.596,4.596 ccw(c-9,4.193) -9,4.764 cw(c-9,4.193) U1.F2@-8.596,4.596 ; U1.F2@-8.596,4.596 cw(c-8.193,5) -8.764,5 ccw(c-8.193,5) U1.F2@-8.596,4.596
  Solder Side w0.1: -10.385,5.5 -9.5,5.5
  Solder Side w0.127: v1(-19.404,4.5) -18.804,5.1 P1-2.34@-17.25,5.1 -13.7,5.1 -13.3,5.5 -11.5,5.5 -10.385,5.5 ; -9.5,5.5 v1(-9,5) ; -19,4.904 ccw(c-18.597,4.5) -19.168,4.5 cw(c-18.597,4.5) -19,4.904 ; -19,4.904 cw(c-19.404,5.307) -19.404,4.736 ccw(c-19.404,5.307) -19,4.904 ; -18.38,5.1 ccw(c-18.38,5.43) -18.147,5.197 cw(c-18.38,5.43) -18.38,5.1 ; -18.38,5.1 cw(c-18.38,4.77) -18.147,5.003 ccw(c-18.38,4.77) -18.38,5.1 ; -16.12,5.1 ccw(c-16.12,4.77) -16.353,5.003 cw(c-16.12,4.77) -16.12,5.1 ; -16.121,5.1 cw(c-16.121,5.429) -16.353,5.197 ccw(c-16.121,5.429) -16.121,5.1 ; -9.404,5.404 ccw(c-9,5.807) -9,5.237 cw(c-9,5.807) -9.404,5.404 ; -9.404,5.404 cw(c-9.807,5) -9.237,5 ccw(c-9.807,5) -9.404,5.404
P1-36: P1-1.36 P1-2.36 U1.F1 | length 21.8
  Component Side w0.127: v1@-18.677,4.5 v1(-18.577,4.5) P1-1.36@-17.25,4.5 ; v1(-10,5) U1.F1@-9.5,4.5 ; v1@-18.38,4.5 ccw(c-18.38,4.83) -18.147,4.597 cw(c-18.38,4.83) v1@-18.38,4.5 ; v1@-18.38,4.5 cw(c-18.38,4.17) -18.147,4.403 ccw(c-18.38,4.17) v1@-18.38,4.5 ; P1-1.36@-18.006,4.5 ccw(c-18.006,3.929) -18.41,4.333 cw(c-18.006,3.929) P1-1.36@-18.006,4.5 ; P1-1.36@-18.006,4.5 cw(c-18.006,5.071) -18.41,4.667 ccw(c-18.006,5.071) P1-1.36@-18.006,4.5 ; v1@-9.818,4.818 ccw(c-9.5,5.137) -9.5,4.686 cw(c-9.5,5.137) v1@-9.818,4.818 ; v1@-9.818,4.818 cw(c-10.137,4.5) -9.686,4.5 ccw(c-10.137,4.5) v1@-9.818,4.818 ; U1.F1@-9.596,4.596 ccw(c-10,4.193) -10,4.764 cw(c-10,4.193) U1.F1@-9.596,4.596 ; U1.F1@-9.596,4.596 cw(c-9.193,5) -9.764,5 ccw(c-9.193,5) U1.F1@-9.596,4.596
  Solder Side w0.127: v1@-18.677,4.5 v1(-18.577,4.5) P1-2.36@-17.25,4.5 -13.7,4.5 -13.2,5 -11.5,5 -10.385,5 ; v1(-10,5) -10.385,5 ; v1@-18.38,4.5 ccw(c-18.38,4.83) -18.147,4.597 cw(c-18.38,4.83) v1@-18.38,4.5 ; v1@-18.38,4.5 cw(c-18.38,4.17) -18.147,4.403 ccw(c-18.38,4.17) v1@-18.38,4.5 ; P1-2.36@-18.006,4.5 ccw(c-18.006,3.929) -18.41,4.333 cw(c-18.006,3.929) P1-2.36@-18.006,4.5 ; P1-2.36@-18.006,4.5 cw(c-18.006,5.071) -18.41,4.667 ccw(c-18.006,5.071) P1-2.36@-18.006,4.5 ; -16.12,4.5 ccw(c-16.12,4.17) -16.353,4.403 cw(c-16.12,4.17) -16.12,4.5 ; -16.121,4.5 cw(c-16.121,4.829) -16.353,4.597 ccw(c-16.121,4.829) -16.121,4.5 ; -10.385,5 ccw(c-10.385,5.195) -10.211,5.107 cw(c-10.385,5.195) -10.385,5 ; -10.385,5 cw(c-10.385,4.805) -10.211,4.893 ccw(c-10.385,4.805) -10.385,5
P1-38: P1-1.38 P1-2.38 U1.G3 | length 27
  Component Side w0.127: v1(-19.404,3.3) -18.804,3.9 P1-1.38@-17.25,3.9 ; v1(-8,4) U1.G3@-7.5,3.5 ; -19,3.704 ccw(c-18.597,3.3) -19.168,3.3 cw(c-18.597,3.3) -19,3.704 ; -19,3.704 cw(c-19.404,4.107) -19.404,3.536 ccw(c-19.404,4.107) -19,3.704 ; -18.38,3.9 ccw(c-18.38,4.23) -18.147,3.997 cw(c-18.38,4.23) -18.38,3.9 ; -18.38,3.9 cw(c-18.38,3.57) -18.147,3.803 ccw(c-18.38,3.57) -18.38,3.9 ; v1@-7.818,3.818 ccw(c-7.5,4.137) -7.5,3.686 cw(c-7.5,4.137) v1@-7.818,3.818 ; v1@-7.818,3.818 cw(c-8.137,3.5) -7.686,3.5 ccw(c-8.137,3.5) v1@-7.818,3.818 ; U1.G3@-7.596,3.596 ccw(c-8,3.193) -8,3.764 cw(c-8,3.193) U1.G3@-7.596,3.596 ; U1.G3@-7.596,3.596 cw(c-7.193,4) -7.764,4 ccw(c-7.193,4) U1.G3@-7.596,3.596
  Solder Side w0.1: -10.385,4.5 -8.5,4.5
  Solder Side w0.127: v1(-19.404,3.3) -18.804,3.9 P1-2.38@-17.25,3.9 ; P1-2.38@-17.2,3.9 P1-2.38@-17.25,3.9 ; -10.385,4.5 -11.5,4.5 -13.1,4.5 -13.7,3.9 P1-2.38@-17.25,3.9 ; -8.5,4.5 v1(-8,4) ; -19,3.704 ccw(c-18.597,3.3) -19.168,3.3 cw(c-18.597,3.3) -19,3.704 ; -19,3.704 cw(c-19.404,4.107) -19.404,3.536 ccw(c-19.404,4.107) -19,3.704 ; -18.38,3.9 ccw(c-18.38,4.23) -18.147,3.997 cw(c-18.38,4.23) -18.38,3.9 ; -18.38,3.9 cw(c-18.38,3.57) -18.147,3.803 ccw(c-18.38,3.57) -18.38,3.9 ; -16.12,3.9 ccw(c-16.12,3.57) -16.353,3.803 cw(c-16.12,3.57) -16.12,3.9 ; -16.121,3.9 cw(c-16.121,4.229) -16.353,3.997 ccw(c-16.121,4.229) -16.121,3.9 ; -8.404,4.404 ccw(c-8,4.807) -8,4.237 cw(c-8,4.807) -8.404,4.404 ; -8.404,4.404 cw(c-8.807,4) -8.237,4 ccw(c-8.807,4) -8.404,4.404
P1-40: P1-1.40 P1-2.40 U1.G1 | length 21.9
  Component Side w0.127: v1@-18.677,3.3 v1(-18.577,3.3) P1-1.40@-17.25,3.3 ; v1(-10,4) U1.G1@-9.5,3.5 ; v1@-18.38,3.3 ccw(c-18.38,3.63) -18.147,3.397 cw(c-18.38,3.63) v1@-18.38,3.3 ; v1@-18.38,3.3 cw(c-18.38,2.97) -18.147,3.203 ccw(c-18.38,2.97) v1@-18.38,3.3 ; P1-1.40@-18.006,3.3 ccw(c-18.006,2.729) -18.41,3.133 cw(c-18.006,2.729) P1-1.40@-18.006,3.3 ; P1-1.40@-18.006,3.3 cw(c-18.006,3.871) -18.41,3.467 ccw(c-18.006,3.871) P1-1.40@-18.006,3.3 ; v1@-9.818,3.818 ccw(c-9.5,4.137) -9.5,3.686 cw(c-9.5,4.137) v1@-9.818,3.818 ; v1@-9.818,3.818 cw(c-10.137,3.5) -9.686,3.5 ccw(c-10.137,3.5) v1@-9.818,3.818 ; U1.G1@-9.596,3.596 ccw(c-10,3.193) -10,3.764 cw(c-10,3.193) U1.G1@-9.596,3.596 ; U1.G1@-9.596,3.596 cw(c-9.193,4) -9.764,4 ccw(c-9.193,4) U1.G1@-9.596,3.596
  Solder Side w0.127: v1@-18.677,3.3 v1(-18.577,3.3) P1-2.40@-17.25,3.3 -13.7,3.3 -13,4 -11.5,4 -10.385,4 ; v1(-10,4) -10.385,4 ; v1@-18.38,3.3 ccw(c-18.38,3.63) -18.147,3.397 cw(c-18.38,3.63) v1@-18.38,3.3 ; v1@-18.38,3.3 cw(c-18.38,2.97) -18.147,3.203 ccw(c-18.38,2.97) v1@-18.38,3.3 ; P1-2.40@-18.006,3.3 ccw(c-18.006,2.729) -18.41,3.133 cw(c-18.006,2.729) P1-2.40@-18.006,3.3 ; P1-2.40@-18.006,3.3 cw(c-18.006,3.871) -18.41,3.467 ccw(c-18.006,3.871) P1-2.40@-18.006,3.3 ; -16.12,3.3 ccw(c-16.12,2.97) -16.353,3.203 cw(c-16.12,2.97) -16.12,3.3 ; -16.121,3.3 cw(c-16.121,3.629) -16.353,3.397 ccw(c-16.121,3.629) -16.121,3.3 ; -10.385,4 ccw(c-10.385,4.195) -10.211,4.107 cw(c-10.385,4.195) -10.385,4 ; -10.385,4 cw(c-10.385,3.805) -10.211,3.893 ccw(c-10.385,3.805) -10.385,4
P1-42: P1-1.42 P1-2.42 U1.H2 | length 26
  Component Side w0.127: v1(-19.404,2.1) -18.804,2.7 P1-1.42@-17.25,2.7 ; v1(-9,3) U1.H2@-8.5,2.5 ; -19,2.504 ccw(c-18.597,2.1) -19.168,2.1 cw(c-18.597,2.1) -19,2.504 ; -19,2.504 cw(c-19.404,2.907) -19.404,2.336 ccw(c-19.404,2.907) -19,2.504 ; -18.38,2.7 ccw(c-18.38,3.03) -18.147,2.797 cw(c-18.38,3.03) -18.38,2.7 ; -18.38,2.7 cw(c-18.38,2.37) -18.147,2.603 ccw(c-18.38,2.37) -18.38,2.7 ; v1@-8.818,2.818 ccw(c-8.5,3.137) -8.5,2.686 cw(c-8.5,3.137) v1@-8.818,2.818 ; v1@-8.818,2.818 cw(c-9.137,2.5) -8.686,2.5 ccw(c-9.137,2.5) v1@-8.818,2.818 ; U1.H2@-8.596,2.596 ccw(c-9,2.193) -9,2.764 cw(c-9,2.193) U1.H2@-8.596,2.596 ; U1.H2@-8.596,2.596 cw(c-8.193,3) -8.764,3 ccw(c-8.193,3) U1.H2@-8.596,2.596
  Solder Side w0.1: -10.385,3.5 -9.5,3.5
  Solder Side w0.127: v1(-19.404,2.1) -18.804,2.7 P1-2.42@-17.25,2.7 ; P1-2.42@-17.2,2.7 P1-2.42@-17.25,2.7 ; -10.385,3.5 -11.5,3.5 -12.9,3.5 -13.7,2.7 P1-2.42@-17.25,2.7 ; -9.5,3.5 v1(-9,3) ; -19,2.504 ccw(c-18.597,2.1) -19.168,2.1 cw(c-18.597,2.1) -19,2.504 ; -19,2.504 cw(c-19.404,2.907) -19.404,2.336 ccw(c-19.404,2.907) -19,2.504 ; -18.38,2.7 ccw(c-18.38,3.03) -18.147,2.797 cw(c-18.38,3.03) -18.38,2.7 ; -18.38,2.7 cw(c-18.38,2.37) -18.147,2.603 ccw(c-18.38,2.37) -18.38,2.7 ; -16.12,2.7 ccw(c-16.12,2.37) -16.353,2.603 cw(c-16.12,2.37) -16.12,2.7 ; -16.121,2.7 cw(c-16.121,3.029) -16.353,2.797 ccw(c-16.121,3.029) -16.121,2.7 ; -9.404,3.404 ccw(c-9,3.807) -9,3.237 cw(c-9,3.807) -9.404,3.404 ; -9.404,3.404 cw(c-9.807,3) -9.237,3 ccw(c-9.807,3) -9.404,3.404
P1-44: P1-1.44 P1-2.44 U1.J2 | length 23.9
  Component Side w0.127: v1@-18.677,2.1 v1(-18.577,2.1) P1-1.44@-17.25,2.1 ; v1(-9,2) U1.J2@-8.5,1.5 ; v1@-18.38,2.1 ccw(c-18.38,2.43) -18.147,2.197 cw(c-18.38,2.43) v1@-18.38,2.1 ; v1@-18.38,2.1 cw(c-18.38,1.77) -18.147,2.003 ccw(c-18.38,1.77) v1@-18.38,2.1 ; P1-1.44@-18.006,2.1 ccw(c-18.006,1.529) -18.41,1.933 cw(c-18.006,1.529) P1-1.44@-18.006,2.1 ; P1-1.44@-18.006,2.1 cw(c-18.006,2.671) -18.41,2.267 ccw(c-18.006,2.671) P1-1.44@-18.006,2.1 ; v1@-8.818,1.818 ccw(c-8.5,2.137) -8.5,1.687 cw(c-8.5,2.137) v1@-8.818,1.818 ; v1@-8.818,1.818 cw(c-9.137,1.5) -8.686,1.5 ccw(c-9.137,1.5) v1@-8.818,1.818 ; U1.J2@-8.596,1.596 ccw(c-9,1.193) -9,1.764 cw(c-9,1.193) U1.J2@-8.596,1.596 ; U1.J2@-8.596,1.596 cw(c-8.193,2) -8.764,2 ccw(c-8.193,2) U1.J2@-8.596,1.596
  Solder Side w0.1: -10.385,2.5 -9.5,2.5
  Solder Side w0.127: v1@-18.677,2.1 v1(-18.577,2.1) P1-2.44@-17.25,2.1 -13.7,2.1 -13.375,2.425 -13.3,2.5 -11.5,2.5 -10.385,2.5 ; -9.5,2.5 v1(-9,2) ; v1@-18.38,2.1 ccw(c-18.38,2.43) -18.147,2.197 cw(c-18.38,2.43) v1@-18.38,2.1 ; v1@-18.38,2.1 cw(c-18.38,1.77) -18.147,2.003 ccw(c-18.38,1.77) v1@-18.38,2.1 ; P1-2.44@-18.006,2.1 ccw(c-18.006,1.529) -18.41,1.933 cw(c-18.006,1.529) P1-2.44@-18.006,2.1 ; P1-2.44@-18.006,2.1 cw(c-18.006,2.671) -18.41,2.267 ccw(c-18.006,2.671) P1-2.44@-18.006,2.1 ; -16.12,2.1 ccw(c-16.12,1.77) -16.353,2.003 cw(c-16.12,1.77) -16.12,2.1 ; -16.121,2.1 cw(c-16.121,2.429) -16.353,2.197 ccw(c-16.121,2.429) -16.121,2.1 ; -9.404,2.404 ccw(c-9,2.807) -9,2.237 cw(c-9,2.807) -9.404,2.404 ; -9.404,2.404 cw(c-9.807,2) -9.237,2 ccw(c-9.807,2) -9.404,2.404
P1-46: P1-1.46 P1-2.46 U1.J1 | length 23.7
  Component Side w0.127: v1(-19.404,0.9) -18.804,1.5 P1-1.46@-17.25,1.5 ; v1(-10,2) U1.J1@-9.5,1.5 ; -19,1.304 ccw(c-18.597,0.9) -19.168,0.9 cw(c-18.597,0.9) -19,1.304 ; -19,1.304 cw(c-19.404,1.707) -19.404,1.136 ccw(c-19.404,1.707) -19,1.304 ; -18.38,1.5 ccw(c-18.38,1.83) -18.147,1.597 cw(c-18.38,1.83) -18.38,1.5 ; -18.38,1.5 cw(c-18.38,1.17) -18.147,1.403 ccw(c-18.38,1.17) -18.38,1.5 ; v1@-9.818,1.818 ccw(c-9.5,2.137) -9.5,1.687 cw(c-9.5,2.137) v1@-9.818,1.818 ; v1@-9.818,1.818 cw(c-10.137,1.5) -9.686,1.5 ccw(c-10.137,1.5) v1@-9.818,1.818 ; U1.J1@-9.596,1.596 ccw(c-10,1.193) -10,1.764 cw(c-10,1.193) U1.J1@-9.596,1.596 ; U1.J1@-9.596,1.596 cw(c-9.193,2) -9.764,2 ccw(c-9.193,2) U1.J1@-9.596,1.596
  Solder Side w0.127: v1(-19.404,0.9) -18.804,1.5 P1-2.46@-17.25,1.5 -13.7,1.5 -13.2,2 -11.5,2 -10.385,2 ; v1(-10,2) -10.385,2 ; -19,1.304 ccw(c-18.597,0.9) -19.168,0.9 cw(c-18.597,0.9) -19,1.304 ; -19,1.304 cw(c-19.404,1.707) -19.404,1.136 ccw(c-19.404,1.707) -19,1.304 ; -18.38,1.5 ccw(c-18.38,1.83) -18.147,1.597 cw(c-18.38,1.83) -18.38,1.5 ; -18.38,1.5 cw(c-18.38,1.17) -18.147,1.403 ccw(c-18.38,1.17) -18.38,1.5 ; -16.12,1.5 ccw(c-16.12,1.17) -16.353,1.403 cw(c-16.12,1.17) -16.12,1.5 ; -16.12,1.5 cw(c-16.12,1.83) -16.353,1.597 ccw(c-16.12,1.83) -16.12,1.5 ; -10.385,2 ccw(c-10.385,2.195) -10.211,2.107 cw(c-10.385,2.195) -10.385,2 ; -10.385,2 cw(c-10.385,1.805) -10.211,1.893 ccw(c-10.385,1.805) -10.385,2
P1-48: P1-1.48 P1-2.48 U1.K2 | length 23.9
  Component Side w0.127: v1@-18.677,0.9 v1(-18.577,0.9) P1-1.48@-17.25,0.9 ; v1(-9,1) U1.K2@-8.5,0.5 ; v1@-18.38,0.9 ccw(c-18.38,1.23) -18.147,0.997 cw(c-18.38,1.23) v1@-18.38,0.9 ; v1@-18.38,0.9 cw(c-18.38,0.57) -18.147,0.803 ccw(c-18.38,0.57) v1@-18.38,0.9 ; P1-1.48@-18.006,0.9 ccw(c-18.006,0.329) -18.41,0.733 cw(c-18.006,0.329) P1-1.48@-18.006,0.9 ; P1-1.48@-18.006,0.9 cw(c-18.006,1.471) -18.41,1.067 ccw(c-18.006,1.471) P1-1.48@-18.006,0.9 ; v1@-8.818,0.818 ccw(c-8.5,1.137) -8.5,0.687 cw(c-8.5,1.137) v1@-8.818,0.818 ; v1@-8.818,0.818 cw(c-9.137,0.5) -8.686,0.5 ccw(c-9.137,0.5) v1@-8.818,0.818 ; U1.K2@-8.596,0.596 ccw(c-9,0.193) -9,0.764 cw(c-9,0.193) U1.K2@-8.596,0.596 ; U1.K2@-8.596,0.596 cw(c-8.193,1) -8.764,1 ccw(c-8.193,1) U1.K2@-8.596,0.596
  Solder Side w0.1: -10.5,0.5 -9.5,0.5
  Solder Side w0.127: v1@-18.677,0.9 v1(-18.577,0.9) P1-2.48@-17.25,0.9 -13.7,0.9 -13.3,0.5 -11.5,0.5 -10.5,0.5 ; -9.5,0.5 v1(-9,1) ; v1@-18.38,0.9 ccw(c-18.38,1.23) -18.147,0.997 cw(c-18.38,1.23) v1@-18.38,0.9 ; v1@-18.38,0.9 cw(c-18.38,0.57) -18.147,0.803 ccw(c-18.38,0.57) v1@-18.38,0.9 ; P1-2.48@-18.006,0.9 ccw(c-18.006,0.329) -18.41,0.733 cw(c-18.006,0.329) P1-2.48@-18.006,0.9 ; P1-2.48@-18.006,0.9 cw(c-18.006,1.471) -18.41,1.067 ccw(c-18.006,1.471) P1-2.48@-18.006,0.9 ; -16.12,0.9 ccw(c-16.12,0.57) -16.353,0.803 cw(c-16.12,0.57) -16.12,0.9 ; -16.121,0.9 cw(c-16.121,1.229) -16.353,0.997 ccw(c-16.121,1.229) -16.121,0.9 ; -9.404,0.596 ccw(c-9.807,1) -9.237,1 cw(c-9.807,1) -9.404,0.596 ; -9.404,0.596 cw(c-9,0.193) -9,0.764 ccw(c-9,0.193) -9.404,0.596
P1-50: P1-1.50 P1-2.50 U1.K3 | length 27
  Component Side w0.127: v1(-19.404,-0.3) -18.804,0.3 P1-1.50@-17.25,0.3 ; v1(-8,1) U1.K3@-7.5,0.5 ; -19,0.104 ccw(c-18.597,-0.3) -19.168,-0.3 cw(c-18.597,-0.3) -19,0.104 ; -19,0.104 cw(c-19.404,0.507) -19.404,-0.064 ccw(c-19.404,0.507) -19,0.104 ; -18.38,0.3 ccw(c-18.38,0.63) -18.147,0.397 cw(c-18.38,0.63) -18.38,0.3 ; -18.38,0.3 cw(c-18.38,-0.03) -18.147,0.203 ccw(c-18.38,-0.03) -18.38,0.3 ; v1@-7.818,0.818 ccw(c-7.5,1.137) -7.5,0.687 cw(c-7.5,1.137) v1@-7.818,0.818 ; v1@-7.818,0.818 cw(c-8.137,0.5) -7.686,0.5 ccw(c-8.137,0.5) v1@-7.818,0.818 ; U1.K3@-7.596,0.596 ccw(c-8,0.193) -8,0.764 cw(c-8,0.193) U1.K3@-7.596,0.596 ; U1.K3@-7.596,0.596 cw(c-7.193,1) -7.764,1 ccw(c-7.193,1) U1.K3@-7.596,0.596
  Solder Side w0.127: v1(-19.404,-0.3) -18.804,0.3 P1-2.50@-17.25,0.3 ; P1-2.50@-17.2,0.3 P1-2.50@-17.25,0.3 ; v1(-8,1) -9,0 -10.5,0 -11.5,0 -13.4,0 -13.7,0.3 P1-2.50@-17.25,0.3 ; -19,0.104 ccw(c-18.597,-0.3) -19.168,-0.3 cw(c-18.597,-0.3) -19,0.104 ; -19,0.104 cw(c-19.404,0.507) -19.404,-0.064 ccw(c-19.404,0.507) -19,0.104 ; -18.38,0.3 ccw(c-18.38,0.63) -18.147,0.397 cw(c-18.38,0.63) -18.38,0.3 ; -18.38,0.3 cw(c-18.38,-0.03) -18.147,0.203 ccw(c-18.38,-0.03) -18.38,0.3 ; -16.12,0.3 ccw(c-16.12,-0.03) -16.353,0.203 cw(c-16.12,-0.03) -16.12,0.3 ; -16.121,0.3 cw(c-16.121,0.629) -16.353,0.397 ccw(c-16.121,0.629) -16.121,0.3 ; -8.404,0.596 ccw(c-8.807,1) -8.237,1 cw(c-8.807,1) -8.404,0.596 ; -8.404,0.596 cw(c-8,0.193) -8,0.764 ccw(c-8,0.193) -8.404,0.596
P1-52: P1-1.52 P1-2.52 U1.K4 | length 26.2
  Component Side w0.127: v1@-18.677,-0.3 v1(-18.577,-0.3) P1-1.52@-17.25,-0.3 ; v1(-7,1) U1.K4@-6.5,0.5 ; v1@-18.38,-0.3 ccw(c-18.38,0.03) -18.147,-0.203 cw(c-18.38,0.03) v1@-18.38,-0.3 ; v1@-18.38,-0.3 cw(c-18.38,-0.63) -18.147,-0.397 ccw(c-18.38,-0.63) v1@-18.38,-0.3 ; P1-1.52@-18.006,-0.3 ccw(c-18.006,-0.871) -18.41,-0.467 cw(c-18.006,-0.871) P1-1.52@-18.006,-0.3 ; P1-1.52@-18.006,-0.3 cw(c-18.006,0.271) -18.41,-0.133 ccw(c-18.006,0.271) P1-1.52@-18.006,-0.3 ; v1@-6.818,0.818 ccw(c-6.5,1.137) -6.5,0.687 cw(c-6.5,1.137) v1@-6.818,0.818 ; v1@-6.818,0.818 cw(c-7.137,0.5) -6.687,0.5 ccw(c-7.137,0.5) v1@-6.818,0.818 ; U1.K4@-6.596,0.596 ccw(c-7,0.193) -7,0.764 cw(c-7,0.193) U1.K4@-6.596,0.596 ; U1.K4@-6.596,0.596 cw(c-6.193,1) -6.764,1 ccw(c-6.193,1) U1.K4@-6.596,0.596
  Solder Side w0.1: -10.5,-0.5 -8.5,-0.5
  Solder Side w0.127: v1@-18.677,-0.3 v1(-18.577,-0.3) P1-2.52@-17.25,-0.3 -13.7,-0.3 -13.5,-0.5 -11.5,-0.5 -10.5,-0.5 ; -8.5,-0.5 v1(-7,1) ; v1@-18.38,-0.3 ccw(c-18.38,0.03) -18.147,-0.203 cw(c-18.38,0.03) v1@-18.38,-0.3 ; v1@-18.38,-0.3 cw(c-18.38,-0.63) -18.147,-0.397 ccw(c-18.38,-0.63) v1@-18.38,-0.3 ; P1-2.52@-18.006,-0.3 ccw(c-18.006,-0.871) -18.41,-0.467 cw(c-18.006,-0.871) P1-2.52@-18.006,-0.3 ; P1-2.52@-18.006,-0.3 cw(c-18.006,0.271) -18.41,-0.133 ccw(c-18.006,0.271) P1-2.52@-18.006,-0.3 ; -16.12,-0.3 ccw(c-16.12,-0.63) -16.353,-0.397 cw(c-16.12,-0.63) -16.12,-0.3 ; -16.121,-0.3 cw(c-16.121,0.029) -16.353,-0.203 ccw(c-16.121,0.029) -16.121,-0.3 ; -7.404,0.596 ccw(c-7.807,1) -7.237,1 cw(c-7.807,1) -7.404,0.596 ; -7.404,0.596 cw(c-7,0.193) -7,0.764 ccw(c-7,0.193) -7.404,0.596
P1-54: P1-1.54 P1-2.54 U1.L1 | length 23.6
  Component Side w0.127: v1(-19.404,-1.5) -18.804,-0.9 P1-1.54@-17.25,-0.9 ; v1(-10,-1) U1.L1@-9.5,-0.5 ; -19,-1.096 ccw(c-18.597,-1.5) -19.168,-1.5 cw(c-18.597,-1.5) -19,-1.096 ; -19,-1.096 cw(c-19.404,-0.693) -19.404,-1.264 ccw(c-19.404,-0.693) -19,-1.096 ; -18.38,-0.9 ccw(c-18.38,-0.57) -18.147,-0.803 cw(c-18.38,-0.57) -18.38,-0.9 ; -18.38,-0.9 cw(c-18.38,-1.23) -18.147,-0.997 ccw(c-18.38,-1.23) -18.38,-0.9 ; v1@-9.818,-0.818 ccw(c-10.137,-0.5) -9.686,-0.5 cw(c-10.137,-0.5) v1@-9.818,-0.818 ; v1@-9.818,-0.818 cw(c-9.5,-1.137) -9.5,-0.686 ccw(c-9.5,-1.137) v1@-9.818,-0.818 ; U1.L1@-9.596,-0.596 ccw(c-9.193,-1) -9.764,-1 cw(c-9.193,-1) U1.L1@-9.596,-0.596 ; U1.L1@-9.596,-0.596 cw(c-10,-0.193) -10,-0.764 ccw(c-10,-0.193) U1.L1@-9.596,-0.596
  Solder Side w0.127: v1(-19.404,-1.5) -18.804,-0.9 P1-2.54@-17.25,-0.9 ; P1-2.54@-17.2,-0.9 P1-2.54@-17.25,-0.9 ; v1(-10,-1) -10.385,-1 ; -19,-1.096 ccw(c-18.597,-1.5) -19.168,-1.5 cw(c-18.597,-1.5) -19,-1.096 ; -19,-1.096 cw(c-19.404,-0.693) -19.404,-1.264 ccw(c-19.404,-0.693) -19,-1.096 ; -18.38,-0.9 ccw(c-18.38,-0.57) -18.147,-0.803 cw(c-18.38,-0.57) -18.38,-0.9 ; -18.38,-0.9 cw(c-18.38,-1.23) -18.147,-0.997 ccw(c-18.38,-1.23) -18.38,-0.9 ; P1-2.54@-17.25,-0.9 -13.7,-0.9 -13.6,-1 -11.5,-1 -10.385,-1 ; -16.12,-0.9 ccw(c-16.12,-1.23) -16.353,-0.997 cw(c-16.12,-1.23) -16.12,-0.9 ; -16.121,-0.9 cw(c-16.121,-0.571) -16.353,-0.803 ccw(c-16.121,-0.571) -16.121,-0.9 ; -10.385,-1 ccw(c-10.385,-0.805) -10.211,-0.893 cw(c-10.385,-0.805) -10.385,-1 ; -10.385,-1 cw(c-10.385,-1.195) -10.211,-1.107 ccw(c-10.385,-1.195) -10.385,-1
P1-56: P1-1.56 P1-2.56 U1.L3 | length 24.7
  Component Side w0.127: v1@-18.677,-1.5 v1(-18.577,-1.5) P1-1.56@-17.25,-1.5 ; v1(-8,-1) U1.L3@-7.5,-0.5 ; v1@-18.38,-1.5 ccw(c-18.38,-1.17) -18.147,-1.403 cw(c-18.38,-1.17) v1@-18.38,-1.5 ; v1@-18.38,-1.5 cw(c-18.38,-1.83) -18.147,-1.597 ccw(c-18.38,-1.83) v1@-18.38,-1.5 ; P1-1.56@-18.006,-1.5 ccw(c-18.006,-2.071) -18.41,-1.667 cw(c-18.006,-2.071) P1-1.56@-18.006,-1.5 ; P1-1.56@-18.006,-1.5 cw(c-18.006,-0.929) -18.41,-1.333 ccw(c-18.006,-0.929) P1-1.56@-18.006,-1.5 ; v1@-7.818,-0.818 ccw(c-8.137,-0.5) -7.686,-0.5 cw(c-8.137,-0.5) v1@-7.818,-0.818 ; v1@-7.818,-0.818 cw(c-7.5,-1.137) -7.5,-0.686 ccw(c-7.5,-1.137) v1@-7.818,-0.818 ; U1.L3@-7.596,-0.596 ccw(c-7.193,-1) -7.764,-1 cw(c-7.193,-1) U1.L3@-7.596,-0.596 ; U1.L3@-7.596,-0.596 cw(c-8,-0.193) -8,-0.764 ccw(c-8,-0.193) U1.L3@-7.596,-0.596
  Solder Side w0.1: -10.385,-1.5 -8.5,-1.5
  Solder Side w0.127: v1@-18.677,-1.5 v1(-18.577,-1.5) P1-2.56@-17.25,-1.5 -11.5,-1.5 -10.385,-1.5 ; -8.5,-1.5 v1(-8,-1) ; v1@-18.38,-1.5 ccw(c-18.38,-1.17) -18.147,-1.403 cw(c-18.38,-1.17) v1@-18.38,-1.5 ; v1@-18.38,-1.5 cw(c-18.38,-1.83) -18.147,-1.597 ccw(c-18.38,-1.83) v1@-18.38,-1.5 ; P1-2.56@-18.006,-1.5 ccw(c-18.006,-2.071) -18.41,-1.667 cw(c-18.006,-2.071) P1-2.56@-18.006,-1.5 ; P1-2.56@-18.006,-1.5 cw(c-18.006,-0.929) -18.41,-1.333 ccw(c-18.006,-0.929) P1-2.56@-18.006,-1.5 ; -16.12,-1.5 ccw(c-16.12,-1.83) -16.353,-1.597 cw(c-16.12,-1.83) -16.12,-1.5 ; -16.121,-1.5 cw(c-16.121,-1.171) -16.353,-1.403 ccw(c-16.121,-1.171) -16.121,-1.5 ; -8.404,-1.404 ccw(c-8.807,-1) -8.237,-1 cw(c-8.807,-1) -8.404,-1.404 ; -8.404,-1.404 cw(c-8,-1.807) -8,-1.237 ccw(c-8,-1.807) -8.404,-1.404